# EAGLE board adns9500-teardrops (EAGLE 5.06)
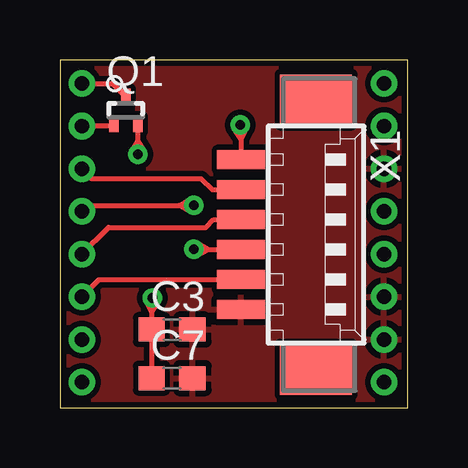
[diagram p0: board, top side]
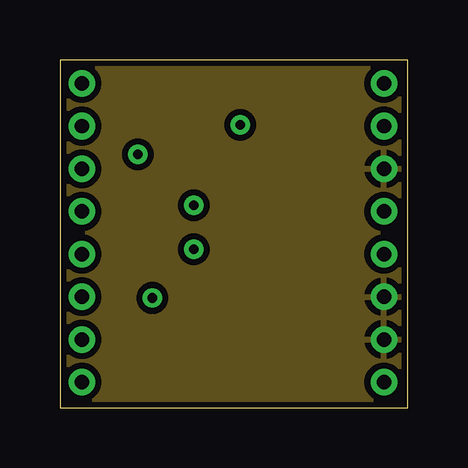
[diagram p1: board, inner layer Route2]
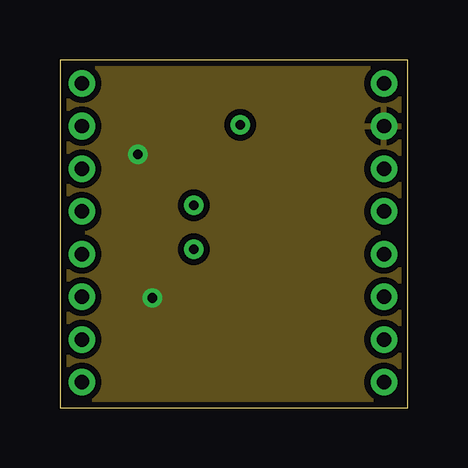
[diagram p2: board, inner layer Route15]
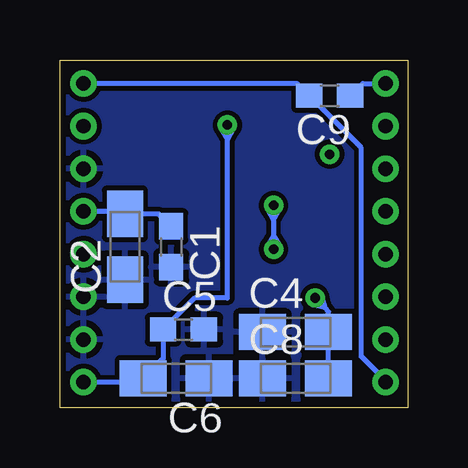
[diagram p3: board, bottom side, seen from below]

Size 14.5 x 14.5 mm. Coordinates in mm from the lower left corner, seen from the top.
Outline: 0,0 14.5,0 14.5,14.5 0,14.5 0,0
Copper layers (1*2+15*16): Top 0.035mm / dielectric 0.4mm / Route2 0.035mm / dielectric 0.04mm / Route15 0.035mm / dielectric 0.4mm / Bottom 0.035mm
Design rules "default *": minimum track width 8mil, minimum drill 0.4mm, track to track 8mil, track to pad 8mil, pad to pad 8mil, via to via 8mil, smd to smd 8mil, copper to edge 10mil, drill to drill 8mil, minimum pad ring 10mil, minimum via ring 8mil, stop-mask expansion 4mil, vias tented up to drill 0.4mm, thermal gap 10mil

## Footprints (pad centres in the part's own frame; a part is rotated, then mirrored left to right if it is on the bottom)
C0603 = smd 1.1 x 1: 1 -0.85,0; 2 0.85,0
A/3216-18R = smd 1.95 x 1.5: + 1.375,0; - -1.375,0
SC75_INFINEON = smd 0.4 x 0.65: 1 -0.5,-0.575; 2 0,0.575; 3 0.5,-0.575
ADNS-9500-PB = drill 0.6 pad 1 round: 1 7.12,6.3; 2 5.34,6.3; 3 3.56,6.3; 4 1.78,6.3; 5 0,6.3; 6 -1.78,6.3; 7 -3.56,6.3; 8 -5.34,6.3; 9 -5.34,-6.3; 10 -3.56,-6.3; 11 -1.78,-6.3; 12 0,-6.3; 13 1.78,-6.3; 14 3.56,-6.3; 15 5.34,-6.3; 16 7.12,-6.3
53261-06 = smd 0.8 x 2: 1 3.125,-2.5; 2 1.875,-2.5; 3 0.625,-2.5; 4 -0.625,-2.5; 5 -1.875,-2.5; 6 -3.125,-2.5 | smd 2.1 x 3: S1 5.625,0.625; S2 -5.625,0.625

## Placement (x,y rotation side)
C1  100n  [C0603]  9.86,6.71 270 bottom
C2  10u  [A/3216-18R]  11.79,6.71 90 bottom
C3  100n  [C0603]  4.67,3.25 0 top
C4  10u  [A/3216-18R]  4.67,3.15 0 bottom
C5  100n  [C0603]  9.35,3.25 0 bottom
C6  10u  [A/3216-18R]  9.65,1.22 180 bottom
C7  10n  [C0603]  4.67,1.22 0 top
C8  1u  [A/3216-18R]  4.67,1.22 0 bottom
C9  470p  [C0603]  3.25,13 180 bottom
Q1  BSA223SP  [SC75_INFINEON]  2.74,12.4 0 top
U1  ADNS-9500  [ADNS-9500-PB]  7.21,6.4 90 top
X1  53261-06  [53261-06]  10.06,7.21 270 top

## Library data of the parts
C1-C9 = resistor
Q1 = transistor-fet
U1 = adns9500
X1 = con-molex

## Nets
+1V8: C1.1 C2.+ U1.13
+2V8: C3.1 C4.+ C7.1 C8.+ Q1.3 U1.15
+5V: C5.1 C6.+ U1.9 X1.6
GND: C1.2 C2.- C3.2 C4.- C5.2 C6.- C7.2 C8.- U1.10 U1.11 U1.14 X1.1
MISO: U1.4 X1.3
MOSI: U1.6 X1.2
N$1: C9.2 U1.8 U1.16
N$3: C9.1 Q1.2 U1.1
N$4: Q1.1 U1.2
NCS: U1.3 X1.5
SCK: U1.5 X1.4
VDD3/REFB: U1.12

## Tracks (layer width: path | path; a pad name or v marks a point on that pad's centre or on a via)
+1V8
  Bottom 0.203: C1.1 10.38,8.08 C2.+ 11.89,8.18 U1.13
+2V8  (via drill 0.4)
  Top 0.203: C7.1 C3.1 3.82,3.97 | 3.82,3.97 3.82,4.54 v3.86,4.57 | v3.25,10.57 v3.24,10.57 3.24,11.17 | Q1.3 3.24,11.17 | 3.82,3.97 4.11,4.4 v3.86,4.57 | 3.82,3.97 3.59,4.44 v3.86,4.57 | 3.24,11.17 2.99,10.71 v3.25,10.57 | 3.24,11.17 3.51,10.72 v3.25,10.57
  Bottom 0.203: 3.44,4.15 3.3,4.01 C4.+ C8.+ | 3.44,4.15 v3.86,4.57 | 3.44,4.15 3.94,4.28 v3.86,4.57 | 3.44,4.15 3.57,4.65 v3.86,4.57
  pour Route15 (isolate 0.254): 0,14.5 14.5,14.5 14.5,0 0,0
+5V  (via drill 0.4)
  Top 0.203: v7.52,11.79 7.56,11.75 7.56,11.19 | 7.56,11.19 X1.6 | 7.56,11.19 7.79,11.65 v7.52,11.79 | 7.56,11.19 7.27,11.62 v7.52,11.79
  Bottom 0.203: U1.9 11.19,1.06 C6.+ 10.2,2.05 C5.1 8.88,4.57 7.52,4.57 7.52,11.19 | 7.52,11.19 v7.52,11.79 | 7.52,11.19 7.78,11.63 v7.52,11.79 | 7.52,11.19 7.26,11.63 v7.52,11.79
GND
  pour Route2 (isolate 0.254): 0,14.5 14.5,14.5 14.5,0 0,0
  pour Top (isolate 0.229): 0,14.5 14.5,14.5 14.5,0 0,0
  pour Bottom (isolate 0.203): 0,14.5 14.5,14.5 14.5,0 0,0
MISO  (via drill 0.4)
  Top 0.203: 6.19,6.59 5.6,6.59 v5.59,6.6 | 6.19,6.59 X1.3 | 4.99,8.43 1.17,8.43 U1.4 | 4.99,8.43 v5.59,8.43 | 6.19,6.59 5.75,6.86 v5.59,6.6 | 6.19,6.59 5.73,6.34 v5.59,6.6 | 4.99,8.43 5.44,8.17 v5.59,8.43 | 4.99,8.43 5.44,8.69 v5.59,8.43
  Bottom 0.203: v5.59,8.43 5.59,7.83 | 5.59,7.83 5.59,7.2 | 5.59,7.2 v5.59,6.6 | 5.59,7.2 5.33,6.76 v5.59,6.6 | 5.59,7.2 5.85,6.76 v5.59,6.6 | 5.59,7.83 5.85,8.28 v5.59,8.43 | 5.59,7.83 5.33,8.28 v5.59,8.43
MOSI
  Top 0.203: X1.2 1.63,5.34 U1.6
N$1
  Bottom 0.203: U1.16 4.62,13.52 C9.2 1.93,10.83 1.93,2.13 0.91,1.12 U1.8
N$3
  Top 0.203: Q1.2 2.19,13.52 U1.1
  Bottom 0.203: C9.1 1.89,13.52 U1.1
N$4
  Top 0.203: Q1.1 2.16,11.74 U1.2
NCS
  Top 0.203: X1.5 6.36,9.09 5.89,9.55 1.32,9.55 U1.3
SCK
  Top 0.203: X1.4 6.42,7.84 6.1,7.52 2.03,7.52 U1.5